# EAGLE board bh (EAGLE 9.6.1)
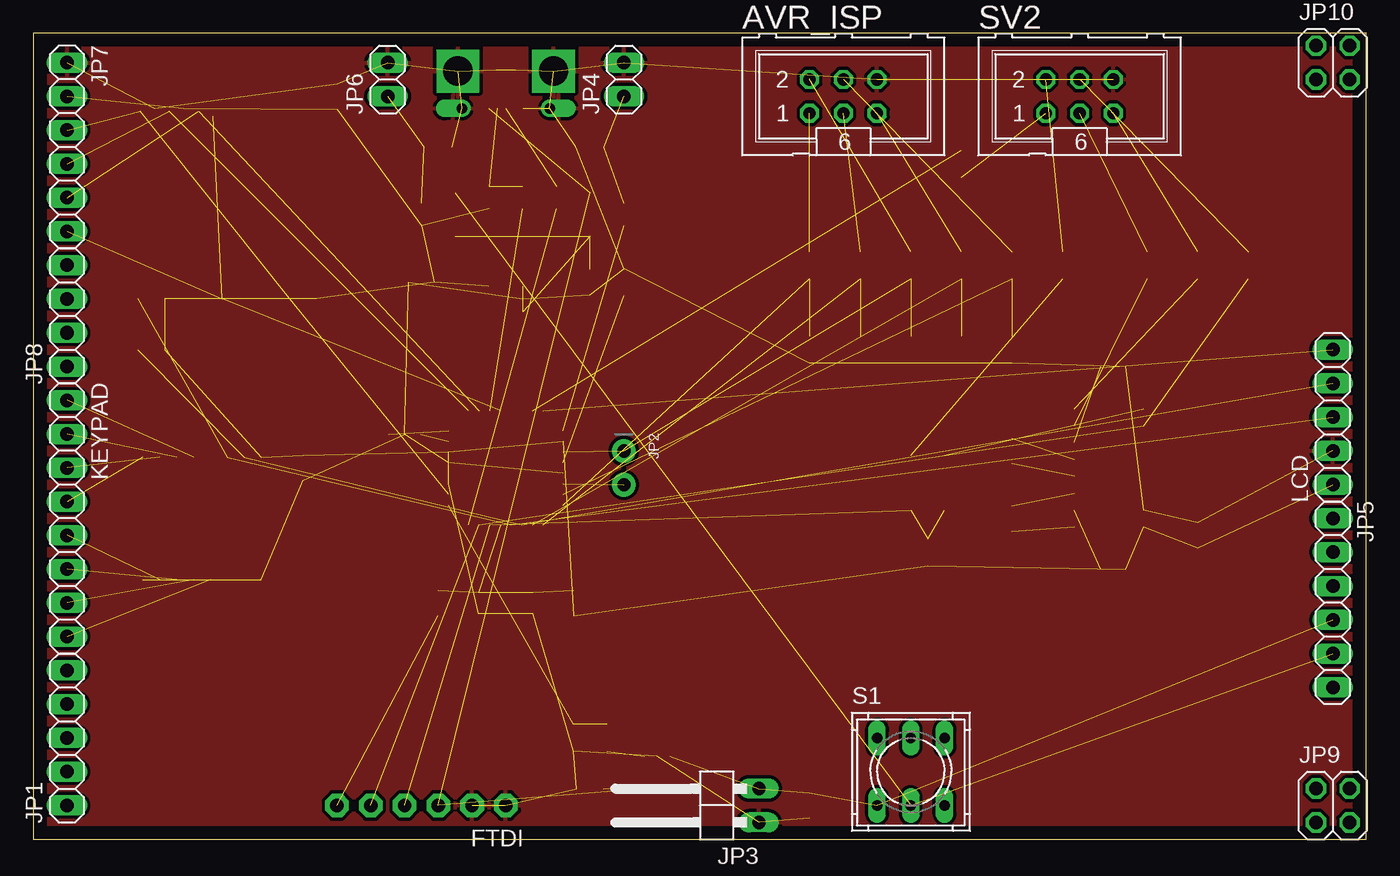
[diagram p0: board, top side]
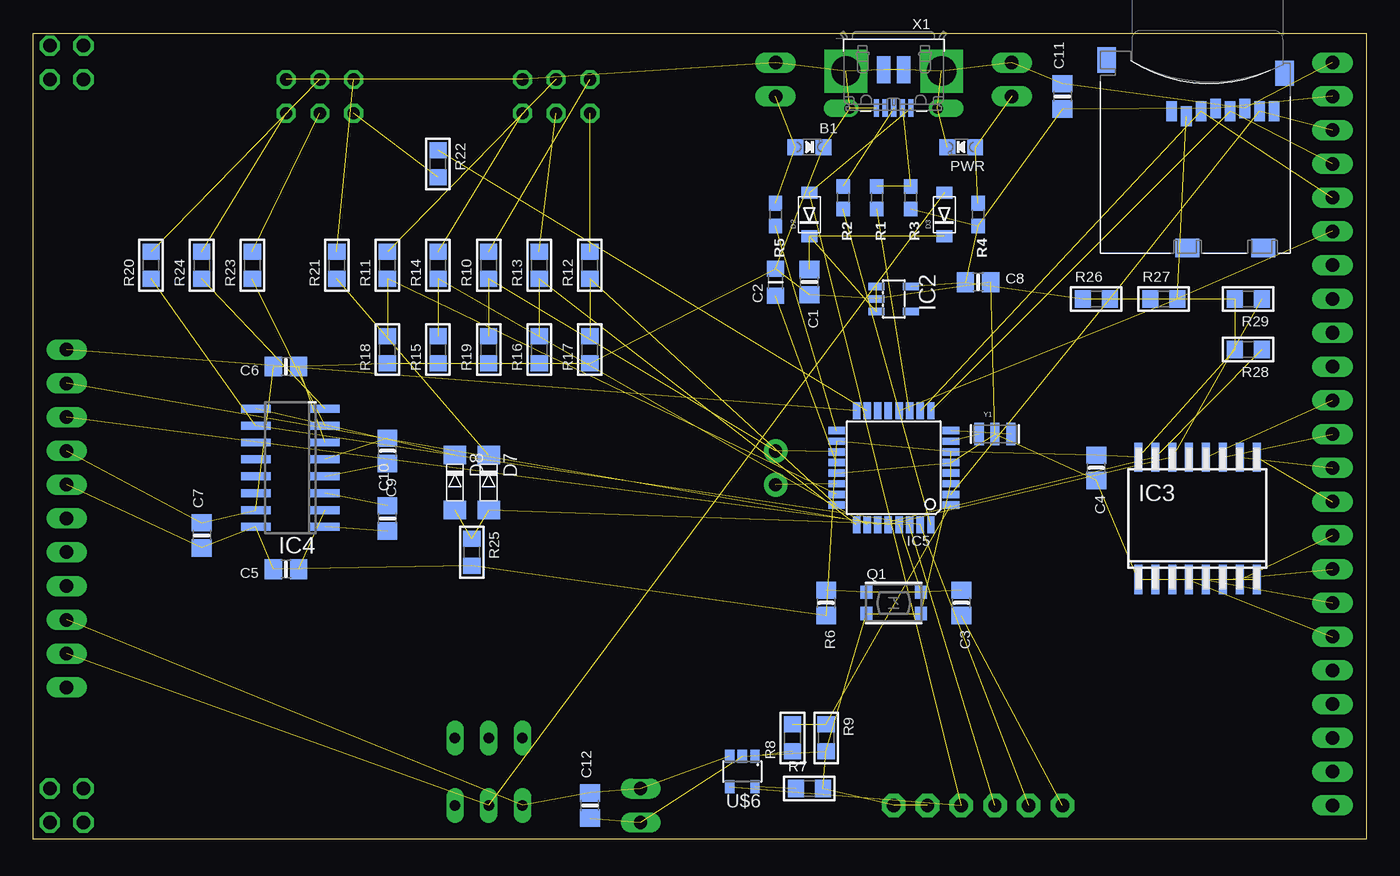
[diagram p1: board, bottom side, seen from below]

Size 100.31 x 60.63 mm. Coordinates in mm from the lower left corner, seen from the top.
Outline: 0,0 100.31,0 100.31,60.63 0,60.63 0,0
Copper layers (1*16): Top 0.035mm / dielectric 1.5mm / Bottom 0.035mm
Design rules "default": minimum track width 6mil, minimum drill 0.35mm, track to track 6mil, track to pad 6mil, pad to pad 6mil, via to via 6mil, smd to smd 6mil, copper to edge 40mil, drill to drill 6mil, minimum pad ring 10mil, minimum via ring 8mil, stop-mask expansion 4mil, vias tented up to drill 0mil, thermal gap 10mil
Net classes: 0 default: width 0.305 mm, clearance 0.254 mm; 1 power: width 0.305 mm, clearance 0.254 mm

## Footprints (pad centres in the part's own frame; a part is rotated, then mirrored left to right if it is on the bottom)
ML6 = drill 0.914 octagon: 1 -2.54,-1.27; 2 -2.54,1.27; 3 0,-1.27; 4 0,1.27; 5 2.54,-1.27; 6 2.54,1.27
CHIPLED_0805_NOOUTLINE = smd 1.2 x 1.2: A 0,-1.05; C 0,1.05
0805-NO = smd 1.3 x 1.5: 1 -0.95,0; 2 0.95,0
_0805MP = smd 1.2 x 1.3: 1 -1.016,0; 2 1.016,0
ADAFRUIT_SOD-123FL = smd 0.91 x 1.22: A 1.637,0; C -1.637,0
SOD-80 = smd 1.397 x 1.702: A 1.905,0; K -2.223,0
ADAFRUIT_1X06-CLEANBIG = drill 1 pad 1.778 octagon: 1 -6.35,0; 2 -3.81,0; 3 -1.27,0; 4 1.27,0; 5 3.81,0; 6 6.35,0
SOT23-5L = smd 0.55 x 1.2: 1 -0.95,-1.3; 2 0,-1.3; 3 0.95,-1.3; 4 0.95,1.3; 5 -0.95,1.3
SO-16DW = smd 0.6 x 2.2: 1 -4.445,-4.6; 2 -3.175,-4.6; 3 -1.905,-4.6; 4 -0.635,-4.6; 5 0.635,-4.6; 6 1.905,-4.6; 7 3.175,-4.6; 8 4.445,-4.6; 9 4.445,4.6; 10 3.175,4.6; 11 1.905,4.6; 12 0.635,4.6; 13 -0.635,4.6; 14 -1.905,4.6; 15 -3.175,4.6; 16 -4.445,4.6
SO-16 = smd 0.6 x 2.2: 1 -4.445,-2.917; 2 -3.175,-2.917; 3 -1.905,-2.917; 4 -0.635,-2.917; 5 0.635,-2.917; 6 1.905,-2.917; 7 3.175,-2.917; 8 4.445,-2.917; 9 4.445,2.283; 10 3.175,2.283; 11 1.905,2.283; 12 0.635,2.283; 13 -0.635,2.283; 14 -1.905,2.283; 15 -3.175,2.283; 16 -4.445,2.283
TQFP32-08 = smd 1.27 x 0.559: 1 -4.293,2.8; 2 -4.293,2; 3 -4.293,1.2; 4 -4.293,0.4; 5 -4.293,-0.4; 6 -4.293,-1.2; 7 -4.293,-2; 8 -4.293,-2.8; 17 4.293,-2.8; 18 4.293,-2; 19 4.293,-1.2; 20 4.293,-0.4; 21 4.293,0.4; 22 4.293,1.2; 23 4.293,2; 24 4.293,2.8 | smd 0.559 x 1.27: 9 -2.8,-4.293; 10 -2,-4.293; 11 -1.2,-4.293; 12 -0.4,-4.293; 13 0.4,-4.293; 14 1.2,-4.293; 15 2,-4.293; 16 2.8,-4.293; 25 2.8,4.293; 26 2,4.293; 27 1.2,4.293; 28 0.4,4.293; 29 -0.4,4.293; 30 -1.2,4.293; 31 -2,4.293; 32 -2.8,4.293
1X05 = drill 1.016 long: 1 -5.08,0; 2 -2.54,0; 3 0,0; 4 2.54,0; 5 5.08,0
1X02_ROUND = drill 1 pad 1.778: 1 -1.27,0; 2 1.27,0
1X02/90 = drill 1 long: 1 -2.54,-3.81; 2 0,-3.81
1X02 = drill 1.016 long: 1 -1.27,0; 2 1.27,0
1X06 = drill 1.016 long: 1 -6.35,0; 2 -3.81,0; 3 -1.27,0; 4 1.27,0; 5 3.81,0; 6 6.35,0
1X04 = drill 1.016 long: 1 -3.81,0; 2 -1.27,0; 3 1.27,0; 4 3.81,0
2X02 = drill 1.016 octagon: 1 -1.27,-1.27; 2 -1.27,1.27; 3 1.27,-1.27; 4 1.27,1.27
1X08 = drill 1.016 long: 1 -8.89,0; 2 -6.35,0; 3 -3.81,0; 4 -1.27,0; 5 1.27,0; 6 3.81,0; 7 6.35,0; 8 8.89,0
BTN_KMR2_4.6X2.8 = smd 0.9 x 1: A 2.05,0.8; A' -2.05,0.8; B 2.05,-0.8; B' -2.05,-0.8
0603-NO = smd 1.1 x 1: 1 -0.85,0; 2 0.85,0
_0805 = smd 1.2 x 1.3: 1 -1.016,0; 2 1.016,0
9077-2 = drill 0.8 long: 1 -2.54,2.54; 2 0,2.54; 3 2.54,2.54; 4 -2.54,-2.54; 5 0,-2.54; 6 2.54,-2.54
SOT23-5 = smd 0.7 x 1: 1 -0.99,-1.17; 2 -0.04,-1.17; 3 0.91,-1.17; 4 0.91,1.13; 5 -0.99,1.13
MICROSD = smd 0.8 x 1.5: 1 -1.94,2.7; 2 -0.84,2.3; 3 0.26,2.7; 4 1.36,2.9; 5 2.46,2.7; 6 3.56,2.9; 7 4.66,2.7; 8 5.76,2.7 | smd 1.4 x 1.9: NC -6.85,6.55; NC3 6.55,5.55 | smd 1.8 x 1.4: NC1 -0.75,-7.6; NC2 4.95,-7.6
MICROBUILDER_4UCONN_20329 = smd 1 x 2: BASE@1 -0.75,-2; BASE@2 0.75,-2 | smd 0.4 x 1.35: D+ 0,0.875; D- -0.65,0.875; GND 1.3,0.875; ID 0.65,0.875; VBUS -1.3,0.875 | drill 0.8 offset: SPRT@1 -3.3,0.9; SPRT@2 3.3,0.9 | drill 2.2 pad 2.7 square: SPRT@3 -3.6,-1.9; SPRT@4 3.6,-1.9
RESONATOR-SMD = smd 0.7 x 1.7: 1 -1.2,0; 2 0,0; 3 1.2,0

## Placement (x,y rotation side)
AVR_ISP  [ML6]  60.96,55.88 0 top
B1  red  [CHIPLED_0805_NOOUTLINE]  41.91,52.07 270 bottom
C1  10uF  [0805-NO]  41.91,41.91 270 bottom
C2  0.1uF  [_0805MP]  44.45,41.91 90 bottom
C3  0.1uF  [0805-NO]  30.48,17.78 270 bottom
C4  10uF  [0805-NO]  20.32,27.94 270 bottom
C5  100n  [0805-NO]  81.28,20.32 180 bottom
C6  100n  [0805-NO]  81.28,35.56 180 bottom
C7  100n  [0805-NO]  87.63,22.86 90 bottom
C8  10uF  [0805-NO]  29.21,41.91 0 bottom
C9  100n  [0805-NO]  73.66,29.21 270 bottom
C10  100n  [0805-NO]  73.66,24.13 90 bottom
C11  10uF  [0805-NO]  22.86,55.88 90 bottom
C12  10uF  [0805-NO]  58.42,2.54 90 bottom
D2  SCHOTTKY  [ADAFRUIT_SOD-123FL]  41.91,46.99 90 bottom
D3  SCHOTTKY  [ADAFRUIT_SOD-123FL]  31.75,46.99 90 bottom
D7  BAT48  [SOD-80]  66.04,26.67 270 bottom
D8  BAT48  [SOD-80]  68.58,26.67 270 bottom
FTDI  [ADAFRUIT_1X06-CLEANBIG]  29.21,2.54 180 top
IC2  MIC5225-3.3v  [SOT23-5L]  35.56,40.64 270 bottom
IC3  PCF8574SOW  [SO-16DW]  12.7,24.13 0 bottom
IC4  MAX3232-SOIC  [SO-16]  81.28,27.94 90 bottom
IC5  MEGA328P  [TQFP32-08]  35.56,27.94 180 bottom
JP1  [1X05]  2.54,7.62 90 top
JP2  [1X02_ROUND]  44.45,27.94 270 top
JP3  Bat Con.  [1X02/90]  50.8,3.81 90 top
JP4  Blink  [1X02]  44.45,57.15 90 top
JP5  Switch Header  [1X06]  97.79,17.78 270 top
JP6  Pwr  [1X02]  26.67,57.15 90 top
JP7  SD Wifi  [1X06]  2.54,52.07 270 top
JP8  [1X04]  2.54,39.37 90 top
JP9  [2X02]  97.79,2.54 0 top
JP10  [2X02]  97.79,58.42 0 top
KEYPAD  [1X08]  2.54,24.13 270 top
LCD  OLED1306  [1X05]  97.79,31.75 90 top
PWR  green  [CHIPLED_0805_NOOUTLINE]  30.48,52.07 90 bottom
Q1  reset  [BTN_KMR2_4.6X2.8]  35.56,17.78 0 bottom
R1  68  [0603-NO]  36.83,48.26 270 bottom
R2  68  [0603-NO]  39.37,48.26 270 bottom
R3  1.5K  [0603-NO]  34.29,48.26 270 bottom
R4  470  [0603-NO]  29.21,46.99 270 bottom
R5  470  [0603-NO]  44.45,46.99 270 bottom
R6  10K  [0805-NO]  40.64,17.78 270 bottom
R7  10k  [_0805]  41.91,3.81 0 bottom
R8  DNP  [_0805]  43.18,7.62 90 bottom
R9  DNP  [_0805]  40.64,7.62 270 bottom
R10  1k  [_0805]  66.04,43.18 90 bottom
R11  1k  [_0805]  73.66,43.18 90 bottom
R12  1k  [_0805]  58.42,43.18 90 bottom
R13  1k  [_0805]  62.23,43.18 90 bottom
R14  1k  [_0805]  69.85,43.18 90 bottom
R15  100k  [_0805]  69.85,36.83 90 bottom
R16  100k  [_0805]  62.23,36.83 90 bottom
R17  100k  [_0805]  58.42,36.83 90 bottom
R18  100k  [_0805]  73.66,36.83 90 bottom
R19  100k  [_0805]  66.04,36.83 90 bottom
R20  150  [_0805]  91.44,43.18 90 bottom
R21  150  [_0805]  77.47,43.18 90 bottom
R22  150  [_0805]  69.85,50.8 270 bottom
R23  150  [_0805]  83.82,43.18 90 bottom
R24  150  [_0805]  87.63,43.18 90 bottom
R25  10k  [_0805]  67.31,21.59 270 bottom
R26  10k  [_0805]  20.32,40.64 0 bottom
R27  10k  [_0805]  15.24,40.64 0 bottom
R28  3k3  [_0805]  8.89,36.83 180 bottom
R29  3k3  [_0805]  8.89,40.64 180 bottom
S1  9077-2  [9077-2]  66.04,5.08 0 top
SV2  [ML6]  78.74,55.88 0 top
U$6  MCP73831  [SOT23-5]  46.99,5.08 180 bottom
U$9  SF-MICROSD  [MICROSD]  12.7,52.07 0 bottom
X1  [MICROBUILDER_4UCONN_20329]  35.56,55.88 180 bottom
Y1  12MHz  [RESONATOR-SMD]  27.94,30.48 0 bottom

## Library data of the parts
AVR_ISP SV2 = con-harting-ml
B1 C1-C12 JP2 PWR Q1 R1-R29 = microbuilder
D2 D3 FTDI X1 = Adafruit Pro Trinket 3v3
D7 D8 IC3 IC4 = _mcom5
IC2 = adafruit
IC5 = avr-6
JP1 JP4-JP10 KEYPAD LCD = pinhead
JP3 = pinhead-2
S1 = switch-misc
U$6 = _moja
U$9 = microsd
Y1 = SparkFun

## Nets
+3V3: C4.1 C5.2 C7.1 C8.1 C11.1 IC2.5 IC3.16 IC4.16 IC5.4 IC5.6 IC5.18 JP7.2 LCD.1 R3.2 R4.2 R6.2 R25.2 R26.1 R27.1 R28.2 R29.2 U$9.4
A0: IC5.23 R11.1 R18.2
A1: IC5.24 R12.1 R17.2
A2: IC5.25 R13.1 R16.2
A3: IC5.26 R14.1 R15.2
A4: IC3.15 IC5.27 LCD.4 R28.1
A5: IC3.14 IC5.28 LCD.3 R29.1
A6: IC5.19 JP2.1 R10.1 R19.2
A7: IC5.22 JP2.2
AREF: C2.1 IC5.20
C1: IC3.12 KEYPAD.1
C2: IC3.11 KEYPAD.2
C3: IC3.10 KEYPAD.3
C4: IC3.9 KEYPAD.4
D2: IC5.32 R2.2
D3: IC5.1 R8.2 R9.1
D4: IC5.2 JP7.3 R26.2 U$9.7
D5: IC5.9 JP7.4 U$9.5
D6: IC5.10 JP7.5 U$9.3
D7: IC5.11 R1.2
D8: IC5.12 JP7.6 R27.2 U$9.2
D9: IC5.13
D10: IC5.14
D11: IC5.15 R22.1
D12: IC5.16 LCD.5
D13: IC5.17 R5.2
D+: R2.1 X1.D+
D-: R1.1 R3.1 X1.D-
DTR/RTS: C3.2 FTDI.6
GND: AVR_ISP.6 B1.C C1.2 C2.2 C4.2 C6.2 C7.2 C8.2 C11.2 C12.1 FTDI.1 FTDI.2 IC2.2 IC3.1 IC3.2 IC3.3 IC3.8 IC4.15 IC5.3 IC5.5 IC5.21 JP3.1 JP4.2 JP6.2 JP7.1 LCD.2 PWR.C Q1.B Q1.B' R7.2 R9.2 R15.1 R16.1 R17.1 R18.1 R19.1 SV2.6 U$6.2 U$9.6 X1.BASE@1 X1.BASE@2 X1.GND X1.SPRT@1 X1.SPRT@2 X1.SPRT@3 X1.SPRT@4 Y1.2
MISO: AVR_ISP.1 R12.2
MOSI: AVR_ISP.4 R11.2
N$2: IC5.7 Y1.1
N$3: IC5.8 Y1.3
N$6: JP6.1 PWR.A R4.1
N$7: C1.1 D2.C D3.C IC2.1 IC2.3
N$14: B1.A JP4.1 R5.1
N$20: C12.2 JP3.2 JP5.4 S1.4 U$6.3
N$26: R7.1 U$6.5
N$28: R8.1 U$6.1
N$37: R20.2 SV2.4
N$38: R21.2 SV2.2
N$39: R22.2 SV2.1
N$40: R23.2 SV2.3
N$41: R24.2 SV2.5
N$43: IC4.7 R23.1
N$44: D7.K R21.1
N$45: D8.K IC4.9
N$47: C6.1 IC4.6
N$48: C5.1 IC4.2
N$50: C9.1 IC4.5
N$51: C10.1 IC4.1
N$52: C10.2 IC4.3
N$53: C9.2 IC4.4
N$54: IC4.8 R24.1
R1: IC3.7 KEYPAD.5
R2: IC3.6 KEYPAD.6
R3: IC3.5 KEYPAD.7
R4: IC3.4 KEYPAD.8
RESET: C3.1 IC5.29 Q1.A Q1.A' R6.1
RST: AVR_ISP.5 R14.2
RXD: D7.A D8.A FTDI.4 IC5.30 R25.1
SCK: AVR_ISP.3 R13.2
TXD: FTDI.5 IC4.10 IC5.31 R20.1
VBAT [power]: D3.A JP5.5 S1.5
VBUS: D2.A FTDI.3 U$6.4 X1.VBUS
VCC: AVR_ISP.2 R10.2

## Tracks (layer width: path | path; a pad name or v marks a point on that pad's centre or on a via)
+3V3  (21 unrouted)
A0  (2 unrouted)
A1  (2 unrouted)
A2  (2 unrouted)
A3  (2 unrouted)
A4  (3 unrouted)
A5  (3 unrouted)
A6  (3 unrouted)
A7  (1 unrouted)
AREF  (1 unrouted)
C1  (1 unrouted)
C2  (1 unrouted)
C3  (1 unrouted)
C4  (1 unrouted)
D2  (1 unrouted)
D3  (2 unrouted)
D4  (3 unrouted)
D5  (2 unrouted)
D6  (2 unrouted)
D7  (1 unrouted)
D8  (3 unrouted)
D11  (1 unrouted)
D12  (1 unrouted)
D13  (1 unrouted)
D+  (1 unrouted)
D-  (2 unrouted)
DTR/RTS  (1 unrouted)
GND  (46 unrouted)
  pour Top: 0,0 100.33,0 100.33,60.96 0,60.96
MISO  (1 unrouted)
MOSI  (1 unrouted)
N$2  (1 unrouted)
N$3  (1 unrouted)
N$6  (2 unrouted)
N$7  (4 unrouted)
N$14  (2 unrouted)
N$20  (4 unrouted)
N$26  (1 unrouted)
N$28  (1 unrouted)
N$37  (1 unrouted)
N$38  (1 unrouted)
N$39  (1 unrouted)
N$40  (1 unrouted)
N$41  (1 unrouted)
N$43  (1 unrouted)
N$44  (1 unrouted)
N$45  (1 unrouted)
N$47  (1 unrouted)
N$48  (1 unrouted)
N$50  (1 unrouted)
N$51  (1 unrouted)
N$52  (1 unrouted)
N$53  (1 unrouted)
N$54  (1 unrouted)
R1  (1 unrouted)
R2  (1 unrouted)
R3  (1 unrouted)
R4  (1 unrouted)
RESET  (4 unrouted)
RST  (1 unrouted)
RXD  (4 unrouted)
SCK  (1 unrouted)
TXD  (3 unrouted)
VBAT  (2 unrouted)
VBUS  (3 unrouted)
VCC  (1 unrouted)